# Altium PCB Vest.PcbDoc (part 2 of 2)
Units mm, origin at the board's own origin, x right, y up, seen from the top; angles counter-clockwise.
Board outline 98 x 59.3 mm, 4 copper layers (Top Layer, GND, Power, Bottom Layer), stack 0.603 mm thick; 89 components, 60 nets, 266 pads, 74 vias.
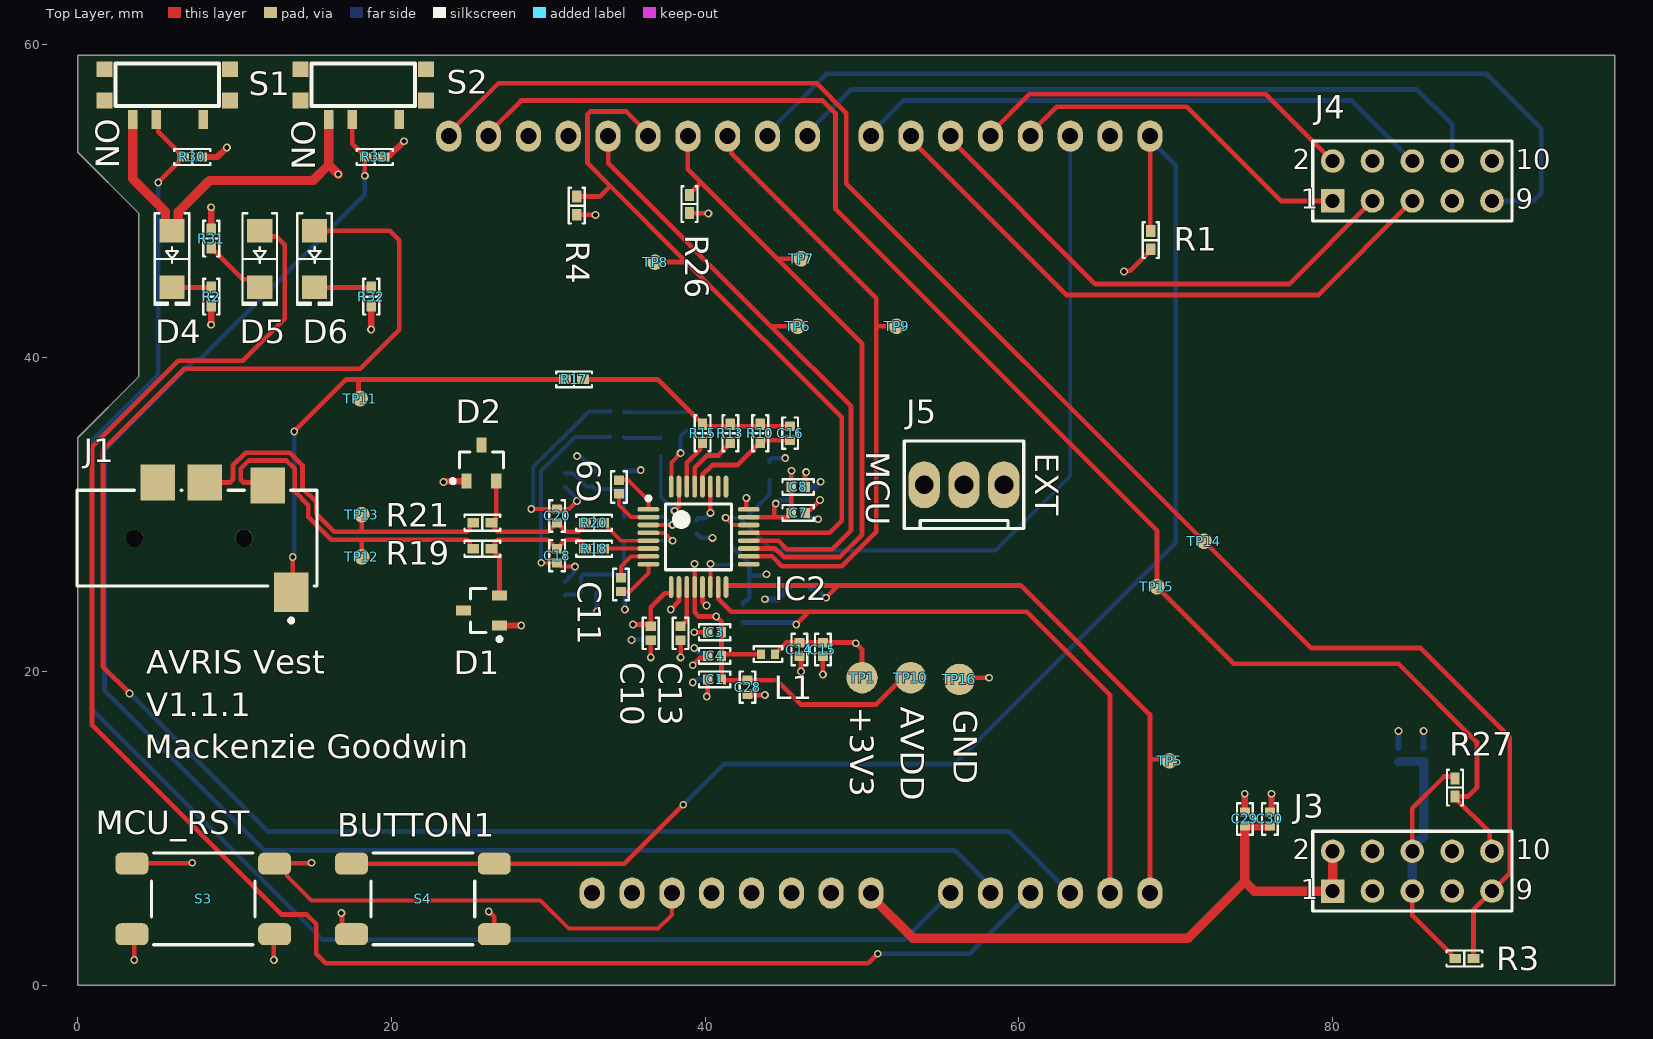
[diagram p0: Top Layer view]

## Via types
v1: diameter 0.5, hole 0.3, Top Layer to Bottom Layer, 62 vias
v2: diameter 0.5, hole 0.3, Top Layer to Bottom Layer, tented both sides, 12 vias

## Nets (pads, with @x,y where several pads share a name; then routed paths per layer and width w, separated by ;. In a path a pad name is that pad's centre, name@x,y a point inside that pad or via, vN(x,y) a via of type N, cw(c..) or ccw(c..) an arc to the next point about the centre after c; other vN are vias at no path point) (continued)
SPI_SCLK: IC2.20 J2.28 TP6.1 | length 40.5
  Top Layer w0.3: J2.28 33.81,52.39 44.25,41.95 ; IC2.20 44.671,28.336 45.207,27.8 48.1,27.8 49.3,29 49.3,36.9 44.25,41.95 ; TP6.1 44.3,42 44.25,41.95
START_ECG: IC2.16 J2.14 R6.1 TP5.1 | length 45.7
  Top Layer w0.3: IC2.16 41.325,25.486 48.4,25.486 ; v1(47.7,24.7) 48.4,25.4 48.4,25.486 ; J2.14 68.35,14.4 ; TP5.1 69.5,14.4 68.35,14.4 ; 48.4,25.486 60.114,25.486 68.35,17.25 68.35,14.4
  Bottom Layer w0.3: R6.1 46.718,25.257 47.143,25.257 v1(47.7,24.7)
SWT1: J2.9 R30.1 S1.2 | length 102.8
  Top Layer w0.3: S1.2 5.131,55.069 5.131,54.394 6.5,53.025 6.5,52.95 R30.1@6.65,52.8 ; v1(5.124,51.171) 5.124,51.199 6.5,52.575 6.5,52.65 R30.1@6.65,52.8 ; R30.1 R30.1@6.65,52.8
  Bottom Layer w0.3: v1(5.124,51.171) 5.124,38.924 0.9,34.7 0.9,17.6 15.6,2.9 52.68,2.9 J2.9
SWT2: J2.10 R33.1 S2.2 | length 106
  Top Layer w0.3: S2.2 17.5,53.65 18.125,53.025 18.125,52.95 18.275,52.8 R33.1 18.3,52.75 v1(18.3,51.6)
  Bottom Layer w0.3: v1(18.3,51.6) 18.3,50.4 7.8,39.9 7.5,39.9 1.7,34.1 1.7,18.8 11.9,8.6 55.9,8.6 58.19,6.31 J2.10
VIN_EXT: C29.1 C30.1 J2.8 J3.1 J3.2 | length 40.2
  Top Layer w0.6: J2.8 50.57,5.67 53.24,3 70.8,3 74.4,6.6 ; C30.1@76.02,10.14 76.02,10.16 C30.1 C29.1 74.4,6.6 ; J3.2 J3.1 75,6 74.4,6.6
pads on no net: D1.3 D2.3 IC2.17 IC2.25 IC2.26 J1. J1.4 J2.1 J2.2 J2.5 J2.16 J2.30 S1.0 S1.1 S2.0 S2.1

## Polygon pours and split planes (outlines as drawn)
GND on GND "GND_L02_P000" (solid, pour order 0): 0,0 98,0 98,59.3 0,59.3

## Silkscreen, mask and mechanical layers (free items; w line width, h text height)
Top Overlay:
  text "ON" at 1.154,55.246 h1.52 r270
  text "ON" at 13.654,55.146 h1.52 r270
  text "MCU" at 50.254,34.046 h1.52 r270
  text "EXT" at 61.054,33.946 h1.52 r270
  text "AVRIS Vest" at 4.354,19.854 h1.52
  text "+3V3" at 49.254,17.746 h1.52 r270
  text "AVDD" at 52.454,17.746 h1.52 r270
  text "GND" at 55.854,17.546 h1.52 r270
  text "V1.1.1" at 4.354,17.154 h1.52
  text "Mackenzie Goodwin" at 4.254,14.454 h1.52
  text "MCU_RST" at 1.154,9.608 h1.52
  text "BUTTON1" at 16.554,9.454 h1.52
Mechanical 1:
  the board outline again, w0.254

## Text inside footprints (layer, text, board x,y; h text height)
J3: Top Overlay "10" at 91.684,8.032 h1.27; Top Overlay "9" at 91.684,5.492 h1.27; Top Overlay "1" at 77.968,5.492 h1.27; Top Overlay "2" at 77.46,8.032 h1.27
J4: Top Overlay "10" at 91.684,52.032 h1.27; Top Overlay "9" at 91.684,49.492 h1.27; Top Overlay "1" at 77.968,49.492 h1.27; Top Overlay "2" at 77.46,52.032 h1.27